# Altium PCB ADC10080_EVALUATION_BOARD.PcbDoc
Units mm, origin at the board's own origin, x right, y up, seen from the top; angles counter-clockwise.
Board outline 109.51 x 54.08 mm, 2 copper layers (Top Layer, Bottom Layer); 18 components, 29 nets, 122 pads, 16 vias.
Unrouted connection lines stored in the file: 2.
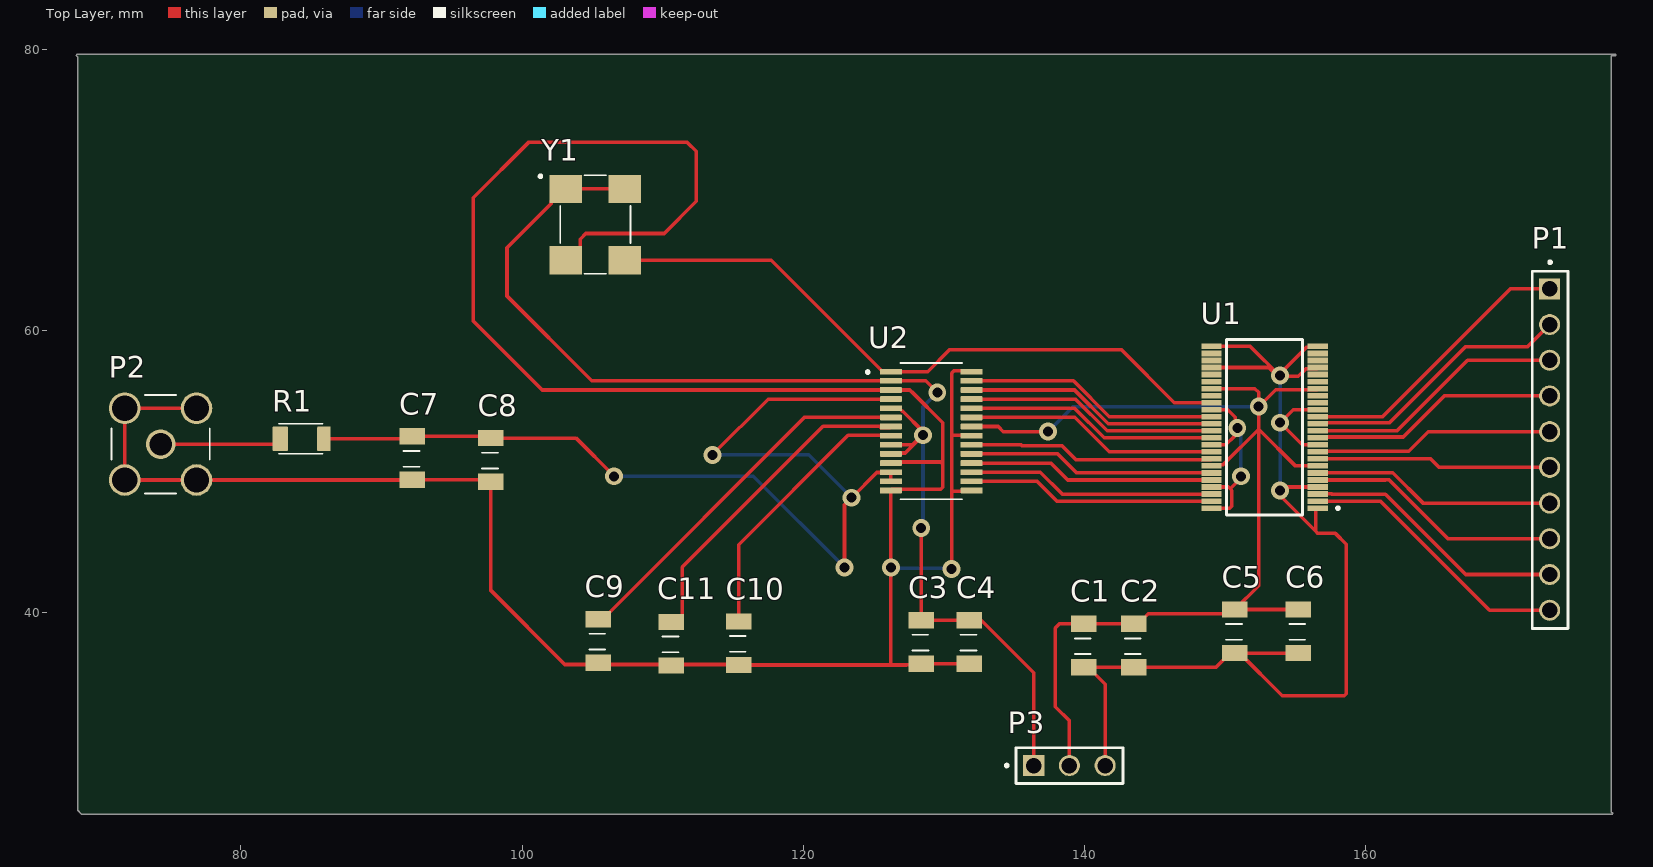
[diagram p0: Top Layer view]
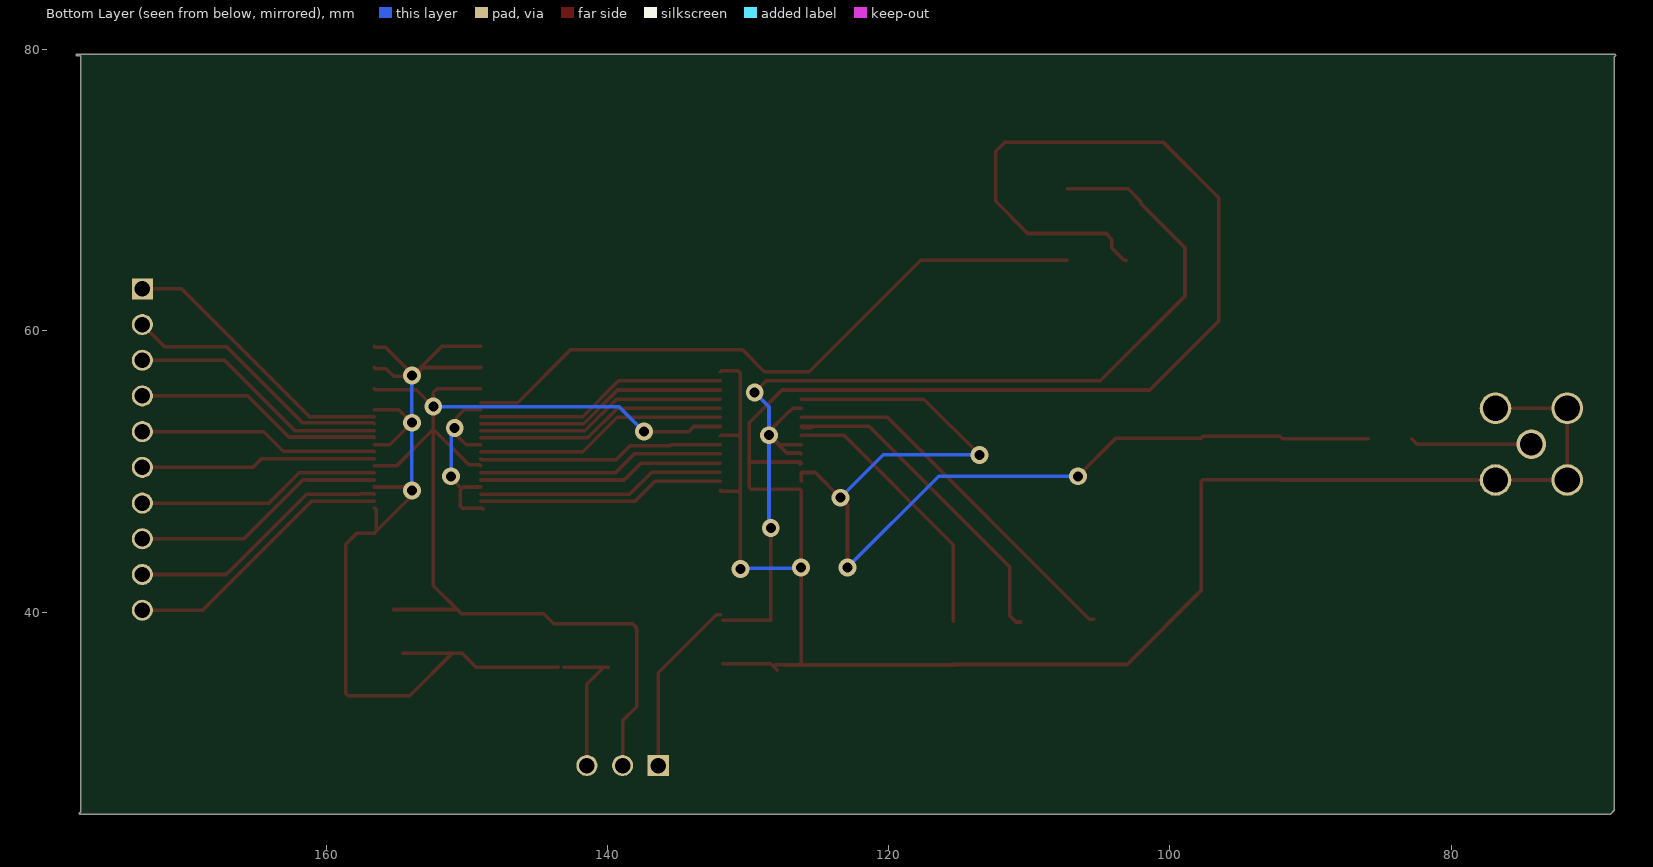
[diagram p1: Bottom Layer view, seen from below]
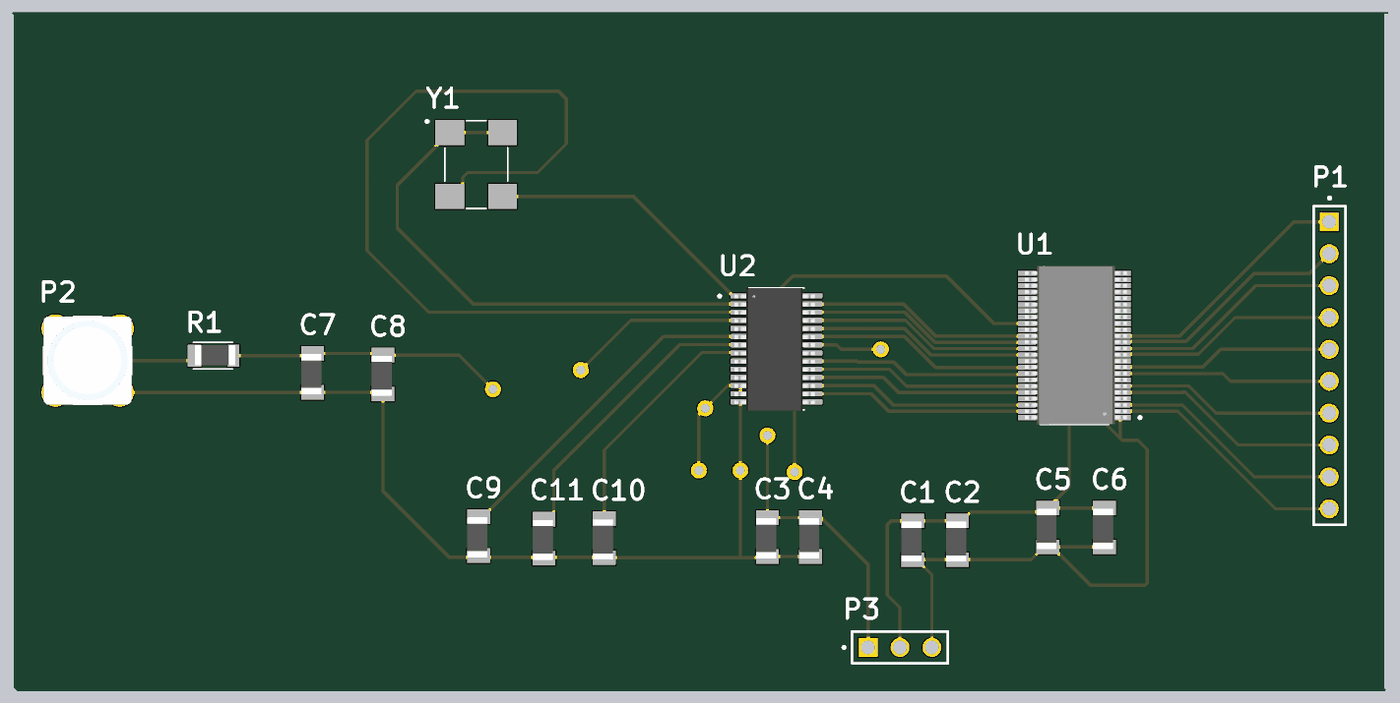
[diagram p2: 3D render of the assembled board from above, using the file's embedded part models]

## Layer stack, top to bottom
Top Solder: solder mask 0.0102, Solder Resist, Dk 3.5
Top Layer: signal copper 0.0356
Dielectric 1: dielectric 0.32, FR-4, Dk 4.8
Bottom Layer: signal copper 0.0356
Bottom Solder: solder mask 0.0102, Solder Resist, Dk 3.5

## Board outline
68.403,25.908 68.403,79.481 68.29,79.593 68.326,79.679 177.8,79.679 177.8,79.579 177.469,79.579 177.469,25.802 177.582,25.69 177.546,25.604 68.707,25.604 68.671,25.618

## Design rules (kind name [scope] priority, off if disabled: settings)
Clearance [All] p1: gap=0.254 ignorepadtopadclearanceinfootprint=FALSE except(0.1: Arc-Track Arc-SMDPad Arc-Poly Track-Track Track-SMDPad Track-Poly SMDPad-SMDPad SMDPad-Poly THPad-Poly Via-Poly Fill-Poly Poly-Poly; 0.152: SMDPad-THPad)
PolygonConnect [All] p1: connectstyle=Relief reliefconductorwidth=0.254 reliefentries=4 polygonreliefangle="90 Angle" airgapwidth=0.254
RoutingVias [All] p1: holewidth=0.711 width=1.27 viastyle="Through Hole" minholewidth=0.711 minwidth=1.27 maxholewidth=0.711 maxwidth=1.27
SolderMaskExpansion [All] p1: expansion=0.102 istentingtop=FALSE
Width [All] p1: maxlimit=0.254 minlimit=0.254 preferedwidth=0.254
30 further rules are at their usual default settings.

## Classes and differential pairs
component class ADC10080_EVALUATION_BOARD.: C1 C2 C3 C4 C5 C6 C7 C8 C9 C10 C11 P1 P2 P3 R1 U1 Y1

## Components (designator, comment, footprint, x,y, rotation, side; value= is the part's Value field where it differs from the comment)
C1 "0.1 uF Capacitor" C_1206 139.954,36.068 r90 top
C2 "4.7 uF Capacitor" C_1206 143.51,36.068 r90 top
C3 "0.1 uF Capacitor" C_1206 128.397,36.322 r90 top
C4 "4.7 uF Capacitor" C_1206 131.826,36.322 r90 top
C5 "4.7 uF Capacitor" C_1206 150.708,37.084 r90 top
C6 "0.1 uF Capacitor" C_1206 155.205,37.084 r90 top
C7 "50 pF Capacitor" C_1206 92.202,49.403 r90 top
C8 "0.1 uF Capacitor" C_1206 97.79,49.276 r90 top
C9 "0.1 uF Capacitor" C_1206 105.41,36.397 r90 top
C10 "0.1 uF Capacitor" C_1206 115.405,36.233 r90 top
C11 "0.1 uF Capacitor" C_1206 110.617,36.195 r90 top
P1 "10 Pin Header" "10 Pin Header" 173.101,62.992 r270 top
P2 "SMA connector" "SMA CONNECTOR" 74.295,51.943 r0 top
P3 "3 Pin Header" "3 pin header" 136.398,29.058 r0 top
R1 "18 ohm Resistor" R_1206 82.804,52.324 r0 top
U1 "Buffer" 74VCX162244MTDX 156.591,47.395 r180 top
U2 "ADC10080" AD10080 126.238,57.098 r0 top
Y1 "40 Mhz Oscillator" CO4305-40.000-EXT-T-TR 103.115,70.104 r0 top

## Footprints (in the part's own frame and the unit in brackets; to place one, negate y for a bottom-side part, rotate by r counter-clockwise, add the part's x,y. Pads: shape width x height; smd on the part's side, far side on the other; paste and mask are expansions set on the pad)
"3 pin header" [mm]
  rect 1.5x1.5 hole 1.1: 1(0,0.025)
  round 1.5 hole 1.1: 2(2.54,0.025) 3(5.08,0.025)
  silkscreen extent -2.02,-1.24 6.35,1.3
"10 Pin Header" [mm]
  rect 1.5x1.5 hole 1.1: 1(0,0)
  round 1.5 hole 1.1: 2(2.54,0) 3(5.08,0) 4(7.62,0) 5(10.16,0) 6(12.7,0) 7(15.24,0) 8(17.78,0) 9(20.32,0) 10(22.86,0)
  silkscreen extent -1.99,-1.24 24.16,1.3
74VCX162244MTDX [mm]
  rect 1.45x0.4 smd: 1(0,0) 2(0,-0.5) 3(0,-1) 4(0,-1.5) 5(0,-2) 6(0,-2.5) 7(0,-3) 8(0,-3.5) 9(0,-4) 10(0,-4.5) 11(0,-5) 12(0,-5.5) 13(0,-6) 14(0,-6.5) 15(0,-7) 16(0,-7.5) 17(0,-8) 18(0,-8.5) 19(0,-9) 20(0,-9.5) 21(0,-10) 22(0,-10.5) 23(0,-11) 24(0,-11.5) 25(7.55,-11.5) 26(7.55,-11) 27(7.55,-10.5) 28(7.55,-10) 29(7.55,-9.5) 30(7.55,-9) 31(7.55,-8.5) 32(7.55,-8) 33(7.55,-7.5) 34(7.55,-7) 35(7.55,-6.5) 36(7.55,-6) 37(7.55,-5.5) 38(7.55,-5) 39(7.55,-4.5) 40(7.55,-4) 41(7.55,-3.5) 42(7.55,-3) 43(7.55,-2.5) 44(7.55,-2) 45(7.55,-1.5) 46(7.55,-1) 47(7.55,-0.5) 48(7.55,0)
  silkscreen extent -1.55,-12 6.47,0.5, body extent -0.41,-12.06 7.69,0.53, height 1.2
AD10080 [mm]
  rrect25% 1.57x0.41 smd: 1(0,0) 2(0,-0.65) 3(0,-1.3) 4(0,-1.95) 5(0,-2.6) 6(0,-3.25) 7(0,-3.9) 8(0,-4.55) 9(0,-5.2) 10(0,-5.85) 11(0,-6.5) 12(0,-7.15) 13(0,-7.8) 14(0,-8.45) 15(5.74,-8.45) 16(5.74,-7.8) 17(5.74,-7.15) 18(5.74,-6.5) 19(5.74,-5.85) 20(5.74,-5.2) 21(5.74,-4.55) 22(5.74,-3.9) 23(5.74,-3.25) 24(5.74,-2.6) 25(5.74,-1.95) 26(5.74,-1.3) 27(5.74,-0.65) 28(5.74,0)
  silkscreen extent -1.75,-9.08 5.07,0.63, body extent -0.48,-9.17 5.92,0.63, height 1.09
C_1206 [mm]
  rect 1.16x1.82 smd: 1(0,0) 2(3.1,0)
  silkscreen extent 0.94,-0.51 2.06,0.64, body extent -0.15,-0.7 3.05,0.9, height 0.6
CO4305-40.000-EXT-T-TR [mm]
  rect 2.3x2 smd: 1(0,0) 2(0,-5.08) 3(4.2,-5.08) 4(4.2,0)
  silkscreen extent -1.9,-6.04 4.6,0.99
R_1206 [mm]
  rrect14% 1.09x1.77 smd: 1(0,0)
  rrect14% 0.94x1.77 smd: 2(3.1,0)
  silkscreen extent -0.08,-1.06 3.02,1.06, body extent 0.03,-0.75 3.23,0.85, height 0.6
"SMA CONNECTOR" [mm]
  round 2.1 hole 1.6: 1(0,0)
  round 2.25 hole 1.8: S1(-2.55,2.55) S2(-2.55,-2.55) S3(2.55,-2.55) S4(2.55,2.55)
  silkscreen extent -3.5,-3.5 3.5,3.5, body extent -3.51,-3.51 3.51,3.51, height 9.78

## Part data
C1 C3 C6 C8 C9 C10 C11: library part C_0.1uF_1206, "0.1 uF 1206 Capacitor"
C2 C4 C5: library part C_4.7uF_1206, "4.7 uF 1206 Capacitor"
C7: library part C_50pF_1206, "50 pF 1206 Capacitor"
P1: "10 Pin Output Header"
P3: library part "3 pin header", "3 Pin Voltage Supply Header"
R1: library part R_18_1206, "18 ohm 1206 Resistor"
U1: library part 74VCX162244MTDX, "Low Voltage 16-Bit Buffer/Line Driver / with 3.6V Tolerant Inputs and Outputs / and 26 Series Resistor in Outputs"
U2: "ADC10080 10-Bit, 80 MSPS, 3V, 78.6 mW A/D Converter"
Y1: library part CO4305-40.000-EXT-T-TR, "40 Mhz 4 pin crystal oscillator"

## Via types
v1: diameter 1.27, hole 0.711, Top Layer to Bottom Layer, 16 vias

## Nets (pads, with @x,y where several pads share a name; then routed paths per layer and width w, separated by ;. In a path a pad name is that pad's centre, name@x,y a point inside that pad or via, vN(x,y) a via of type N, cw(c..) or ccw(c..) an arc to the next point about the centre after c; other vN are vias at no path point)
GND: C1.1 C2.1 C3.1 C4.1 C5.1 C6.1 C7.1 C8.1 C9.1 C10.1 C11.1 P2.S1 P2.S2 P2.S3 P2.S4 P3.3 U1.1 U1.4 U1.10 U1.15 U1.21 U1.24 U1.25 U1.28 U1.34 U1.39 U1.45 U1.48 U2.3 U2.11 U2.14 U2.15 U2.21 U2.28 Y1.2 | length 304.9
  Top Layer w0.254: P2.S4 P2.S1 P2.S2 P2.S3 92.192,49.393 C7.1 97.663,49.403 C8.1 97.79,41.529 103.049,36.27 115.368,36.27 C10.1 127.343,36.233 127.36,36.25 C3.1@128.071,36.25 ; Y1.2 103.265,65.024 104.138,65.897 104.138,66.524 104.543,66.929 110.109,66.929 112.395,69.215 112.395,72.771 111.76,73.406 100.457,73.406 96.52,69.469 96.52,60.706 101.428,55.798 127.59,55.798 127.808,55.58 129.921,53.467 129.921,50.524 ; 126.238,36.233 v1(126.238,43.18) U2.14 ; U2.14@126.316,48.726 129.772,48.726 129.921,48.875 129.921,50.524 ; U2.11@126.316,50.52 U2.11 126.313,50.673 129.772,50.673 129.921,50.524 ; C3.1@127.944,35.869 C3.1 C4.1 ; v1(130.556,43.053) 130.556,48.581 ; U2.15 131.911,48.581 130.556,48.581 ; U2.21 131.948,52.578 130.556,52.578 ; U2.28 131.926,57.15 130.705,57.15 130.556,57.001 130.556,52.578 ; C1.1 C1.1@140.284,36.068 ; P3.3 141.478,34.874 C1.1@140.284,36.068 ; C2.1@143.129,36.068 C1.1@140.284,36.068 ; C2.1 149.362,36.068 150.378,37.084 C5.1 C5.1@151.038,37.084 ; U1.48@148.844,47.322 148.917,47.395 U1.48 150.346,47.395 150.495,47.544 150.495,48.641 150.368,48.768 ; U1.45 150.241,48.895 150.368,48.768 ; U1.39 150.066,51.895 150.682,52.511 150.682,52.892 v1(150.876,53.086) 150.729,53.233 150.729,53.868 150.202,54.395 U1.34 ; U1.28 153.113,57.395 153.739,56.769 v1@153.924,56.769 ; U1.25 151.798,58.895 v1@153.924,56.769 ; v1(151.13,49.657) 151.13,49.53 150.368,48.768 ; C6.1@154.57,37.084 C5.1@151.038,37.084 ; U1.1 156.537,47.395 156.464,47.322 156.464,45.742 ; U1.4 154.178,48.895 v1(153.924,48.641) 153.924,48.282 156.464,45.742 ; U1.10 155.496,51.895 v1(153.924,53.467) 154.852,54.395 U1.15 ; U1.21 156.518,57.322 155.772,57.322 155.219,56.769 v1@153.924,56.769 ; U1.24 156.518,58.822 155.772,58.822 153.924,56.974 v1(153.924,56.838) v1@153.924,56.769 ; 130.556,48.581 130.556,52.578 ; C5.1@151.038,37.084 154.086,34.036 158.474,34.036 158.623,34.185 158.623,44.831 157.861,45.593 156.613,45.593 156.464,45.742
  Bottom Layer w0.254: v1(126.238,43.18) 126.301,43.116 130.493,43.116 v1(130.556,43.053) ; v1(150.876,53.086) 150.876,52.959 151.13,52.705 v1(151.13,49.657) ; v1(153.924,48.641) v1(153.924,53.467) v1(153.924,56.838)
NetC7_2: C7.2 C8.2 R1.2 U2.4 U2.12 U2.13 | length 75.8
  Top Layer w0.254: R1.2 92.023,52.324 C7.2 97.663,52.503 C8.2 103.834,52.376 v1(106.553,49.657) ; v1(113.538,51.181) 117.505,55.148 U2.4 ; v1(122.936,43.18) 122.936,47.625 v1(123.444,48.133) 125.241,49.93 126.22,49.93 U2.12 U2.13
  Bottom Layer w0.254: v1(106.553,49.657) 116.459,49.657 v1(122.936,43.18) ; v1(113.538,51.181) 120.396,51.181 v1(123.444,48.133)
NetC9_2: C9.2 U2.6 | length 26.8
  Top Layer w0.254: C9.2 105.74,39.497 120.091,53.848 U2.6
NetC10_2: C10.2 U2.8 | length 19.5
  Top Layer w0.254: C10.2 115.405,44.793 123.19,52.578 126.208,52.578 U2.8
NetC11_2: C11.2 U2.7 | length 24.2
  Top Layer w0.254: C11.2 110.947,39.295 111.4,39.748 111.4,43.201 121.412,53.213 126.223,53.213 U2.7 126.16,53.12 U2.7@125.529,53.12
NetP1_1: P1.1 U1.14 | length 20.3
  Top Layer w0.254: U1.14 161.21,53.895 170.307,62.992 P1.1
NetP1_2: P1.2 U1.13 | length 19.4
  Top Layer w0.254: U1.13 156.664,53.468 157.338,53.468 161.703,53.468 167.107,58.872 171.521,58.872 P1.2
NetP1_3: P1.3 U1.12 | length 18.6
  Top Layer w0.254: U1.12 162.242,52.895 167.259,57.912 P1.3
NetP1_4: P1.4 U1.11 | length 17.7
  Top Layer w0.254: U1.11 156.647,52.451 162.687,52.451 165.608,55.372 P1.4
NetP1_5: P1.5 U1.9 | length 17.1
  Top Layer w0.254: U1.9 156.631,51.435 163.068,51.435 164.465,52.832 P1.5
NetP1_6: P1.6 U1.8 | length 16.8
  Top Layer w0.254: U1.8 164.624,50.895 165.227,50.292 P1.6
NetP1_7: P1.7 U1.6 | length 17.4
  Top Layer w0.254: U1.6 156.607,49.911 161.925,49.911 164.084,47.752 P1.7
NetP1_8: P1.8 U1.5 | length 18.3
  Top Layer w0.254: U1.5 161.381,49.395 161.395,49.381 161.439,49.425 161.649,49.425 165.862,45.212 P1.8
NetP1_9: P1.9 U1.3 | length 18.9
  Top Layer w0.254: U1.3 156.605,48.409 157.585,48.409 157.607,48.387 161.417,48.387 167.132,42.672 P1.9
NetP1_10: P1.10 U1.2 | length 19.7
  Top Layer w0.254: U1.2 161.058,47.895 168.821,40.132 P1.10
NetP2_1: P2.1 R1.1 | length 8.7
  Top Layer w0.254: P2.1 82.423,51.943 R1.1
NetU1_33: U1.33 U2.1 Y1.3 | length 47.2
  Top Layer w0.254: Y1.3 117.732,65.024 125.658,57.098 U2.1 128.853,57.098 130.429,58.674 142.621,58.674 146.4,54.895 U1.33
NetU1_35: U1.35 U2.27 | length 18.1
  Top Layer w0.254: U2.27 139.224,56.448 141.777,53.895 U1.35
NetU1_36: U1.36 U2.26 | length 18.1
  Top Layer w0.254: U2.26 139.299,55.798 141.702,53.395 U1.36
NetU1_37: U1.37 U2.25 | length 18
  Top Layer w0.254: U2.25 139.374,55.148 141.627,52.895 U1.37
NetU1_38: U1.38 U2.24 | length 17.9
  Top Layer w0.254: U2.24 131.993,54.483 139.319,54.483 141.407,52.395 U1.38
NetU1_40: U1.40 U2.23 | length 18.1
  Top Layer w0.254: U2.23 139.313,53.848 141.766,51.395 U1.40
NetU1_41: U1.41 U2.20 | length 17.5
  Top Layer w0.254: U2.20 135.492,51.898 135.574,51.816 138.43,51.816 139.424,50.822 148.968,50.822 U1.41
NetU1_43: U1.43 U2.19 | length 17.6
  Top Layer w0.254: U2.19 138.109,51.248 139.462,49.895 U1.43
NetU1_44: U1.44 U2.18 | length 17.6
  Top Layer w0.254: U2.18 137.616,50.598 138.819,49.395 U1.44
NetU1_46: U1.46 U2.17 | length 17.7
  Top Layer w0.254: U2.17 136.869,49.948 138.422,48.395 U1.46
NetU1_47: U1.47 U2.16 | length 17.6
  Top Layer w0.254: U2.16 136.63,49.298 138.033,47.895 U1.47
Vdda: C3.2 C4.2 P3.1 U2.2 U2.5 U2.9 U2.10 Y1.1 Y1.4 | length 88.6
  Top Layer w0.254: Y1.4 Y1.1 102.965,70.104 102.092,69.231 102.092,69.081 98.933,65.922 98.933,62.484 104.969,56.448 U2.2 128.718,56.448 v1(129.54,55.626) ; U2.10 126.302,51.312 127.258,51.312 v1(128.524,52.578) ; U2.9 127.767,51.898 128.447,52.578 v1(128.524,52.578) ; U2.5@126.253,54.483 U2.5 126.818,54.498 127.036,54.28 127.087,54.28 128.524,52.843 v1(128.524,52.578) ; v1(128.397,45.974) C3.2 C4.2 ; C4.2@131.953,39.803 132.283,39.803 136.398,35.688 P3.1
  Bottom Layer w0.254: v1(128.397,45.974) 128.524,46.101 v1(128.524,52.578) 128.524,54.61 v1(129.54,55.626)
Vddıo: C1.2 C2.2 C5.2 C6.2 P3.2 U1.7 U1.18 U1.31 U1.42 U2.22 | length 83.4
  Top Layer w0.254: U2.22 133.873,53.198 134.239,52.832 v1(137.414,52.832) ; P3.2 138.938,32.258 137.922,33.274 137.922,38.862 138.228,39.168 C1.2 143.84,39.168 144.55,39.878 150.402,39.878 C5.2 ; U1.42 149.114,50.468 149.86,50.468 152.4,53.008 ; U1.31 152.131,55.895 152.4,55.626 v1(152.4,54.61) ; C6.2 C5.2 ; U1.7 155.013,50.395 152.4,53.008 ; U1.18 156.518,55.822 153.612,55.822 v1(152.4,54.61) ; C5.2 152.4,41.876 152.4,53.008 ; 152.4,53.008 v1(152.4,54.61)
  Bottom Layer w0.254: v1(137.414,52.832) 139.192,54.61 v1(152.4,54.61)
pads on no net: U1.16 U1.17 U1.19 U1.20 U1.22 U1.23 U1.26 U1.27 U1.29 U1.30 U1.32